# EAGLE board PCB_MCU (EAGLE 9.6.2)

Size 142.22 x 169.85 mm. Coordinates in mm from the lower left corner, seen from the top.
Outline: 0,0 142.22,0 142.22,169.85 0,169.85 0,0
Copper layers (1*16): Top 0.035mm / dielectric 1.5mm / Bottom 0.035mm
Design rules "default": minimum track width 6mil, minimum drill 0.35mm, track to track 6mil, track to pad 6mil, pad to pad 6mil, via to via 6mil, smd to smd 6mil, copper to edge 40mil, drill to drill 6mil, minimum pad ring 10mil, minimum via ring 8mil, stop-mask expansion 4mil, vias tented up to drill 0mil, thermal gap 10mil

## Footprints (pad centres in the part's own frame; a part is rotated, then mirrored left to right if it is on the bottom)
RWW0021A = smd 0.7 x 0.3: 1 -1.35,1.7; 9 -1.35,-1.7; 11 1.35,-1.7; 19 1.35,1.7 | smd 0.7 x 0.2: 2 -1.35,1.2; 3 -1.35,0.8; 4 -1.35,0.4; 5 -1.35,0; 6 -1.35,-0.4; 7 -1.35,-0.8; 8 -1.35,-1.2; 12 1.35,-1.2; 13 1.35,-0.8; 14 1.35,-0.4; 15 1.35,0; 16 1.35,0.4; 17 1.35,0.8; 18 1.35,1.2 | smd 0.3 x 1.9: 10 -0.3,-1.25; 20 0.3,1.25; 21 -0.3,1.25
SULLINS_PPTC041LFBN-RC = drill 1.07 square: 1 -3.81,0 | drill 1.07: 2 -1.27,0; 3 1.27,0; 4 3.81,0
CONN19_PPTC191LFBN-RC_SUL = drill 1.067 pad 1.575: 1 0,0; 2 2.54,0; 3 5.08,0; 4 7.62,0; 5 10.16,0; 6 12.7,0; 7 15.24,0; 8 17.78,0; 9 20.32,0; 10 22.86,0; 11 25.4,0; 12 27.94,0; 13 30.48,0; 14 33.02,0; 15 35.56,0; 16 38.1,0; 17 40.64,0; 18 43.18,0; 19 45.72,0
TE_282837-2 = drill 1.1 square: 1 -2.54,0 | drill 1.1: 2 2.54,0
C0805 = smd 1.3 x 1.5: 1 -0.95,0; 2 0.95,0
SOD3715X145N = smd 1.21 x 0.73: A 1.68,0; C -1.68,0
MBTB-D-SOD-923F-IMP-0402 = smd 0.5 x 0.6: 1 -0.525,0; 2 0.525,0
SOIC127P600X175-16N = smd 1.97 x 0.6: 1 -2.475,4.445; 2 -2.475,3.175; 3 -2.475,1.905; 4 -2.475,0.635; 5 -2.475,-0.635; 6 -2.475,-1.905; 7 -2.475,-3.175; 8 -2.475,-4.445; 9 2.475,-4.445; 10 2.475,-3.175; 11 2.475,-1.905; 12 2.475,-0.635; 13 2.475,0.635; 14 2.475,1.905; 15 2.475,3.175; 16 2.475,4.445
USB4110-GF-A_GCT = drill 0.66 pad 0.66: 13 -2.896,2.286; 14 2.896,2.286 | smd 2.159 x 2.007: 15 -5.11,2.788; 16 5.11,2.788; 17 -5.11,-1.142; 18 5.11,-1.142 | smd 0.61 x 1.143: A1-B12 -3.2,3.363; A4-B9 -2.4,3.363; A9-B4 2.4,3.363; A12-B1 3.2,3.363 | smd 0.305 x 1.143: A5 -1.25,3.363; A6 -0.25,3.363; A7 0.25,3.363; A8 1.25,3.363; B5 1.75,3.363; B6 0.75,3.363; B7 -0.75,3.363; B8 -1.75,3.363
6000-XXXX-RC = drill 0.9 pad 1.422: 1 -2.5,0; 2 2.5,0
SMARTLED-TTW = smd 0.8 x 0.5: A 0,-0.875; C 0,0.875 | smd 0.35 x 0.35: A@1 0,-0.5; C@1 0,0.5
MOD28_ESP32-C6-WROOM-1_EXP = smd 1.499 x 0.889: 1 -8.75,5.26; 2 -8.75,3.99; 3 -8.75,2.72; 4 -8.75,1.45; 5 -8.75,0.18; 6 -8.75,-1.09; 7 -8.75,-2.36; 8 -8.75,-3.63; 9 -8.75,-4.9; 10 -8.75,-6.17; 11 -8.75,-7.44; 12 -8.75,-8.71; 13 -8.75,-9.98; 14 -8.75,-11.25; 15 8.75,-11.25; 16 8.75,-9.98; 17 8.75,-8.71; 18 8.75,-7.44; 19 8.75,-6.17; 20 8.75,-4.9; 21 8.75,-3.63; 22 8.75,-2.36; 23 8.75,-1.09; 24 8.75,0.18; 25 8.75,1.45; 26 8.75,2.72; 27 8.75,3.99; 28 8.75,5.26 | smd 0.813 x 0.813: 29 -1.505,-0.46; 30 -2.755,0.79; 31 -2.755,-0.46; 32 -2.755,-1.71; 33 -1.505,-1.71; 34 -0.255,-1.71; 35 -0.255,-0.46; 36 -0.255,0.79; 37 -1.505,0.79
JP1 = drill 0.914 long: 1 0,-1.27; 2 0,1.27
SOIC127P599X175-8N = smd 1.97 x 0.6: 1 -2.47,1.905; 2 -2.47,0.635; 3 -2.47,-0.635; 4 -2.47,-1.905; 5 2.47,-1.905; 6 2.47,-0.635; 7 2.47,0.635; 8 2.47,1.905
TRANS_SS8050-G = smd 0.8 x 0.6: 1 -1.01,0.95; 2 -1.01,-0.95; 3 1.01,0
M0805 = smd 1.3 x 1.6: 1 -0.95,0; 2 0.95,0
MICROSD = smd 0.7 x 1.5: 1 9,-10.64; 2 7.9,-10.24; 3 6.8,-10.64; 4 5.7,-11.04; 5 4.6,-10.64; 6 3.5,-11.04; 7 2.4,-10.64; 8 1.3,-10.64 | smd 1.8 x 1.4: CD1 2,-0.44; CD2 8,-0.44 | smd 1.4 x 1.9: MT1 0.4,-13.54; MT2 13.6,-14.44
SOT95P280X145-6N = smd 1.32 x 0.59: 1 -1.145,0.95; 2 -1.145,0; 3 -1.145,-0.95; 4 1.145,-0.95; 5 1.145,0; 6 1.145,0.95
CONN_USB-AP-S-RA-SMT_ADM = smd 1.092 x 2.007: 1 -3.5,9.842; 2 -1,9.842; 3 1,9.842; 4 3.5,9.842 | drill 1.092 pad 1.092: 5 -2.286,7.366; 6 2.286,7.366 | smd 1.499 x 2.997: 7 -5.842,7.353; 8 5.842,7.353 | drill 0.991 pad 0.991: S_1_H1 -5.842,8.103; S_1_H2 -5.842,6.604; S_2_H1 5.842,8.103; S_2_H2 5.842,6.604
SW_1825910-6-4 = drill 0.99 square: 1 -3.25,2.25 | drill 0.99: 2 3.25,2.25; 3 -3.25,-2.25; 4 3.25,-2.25
SOD-123_ONS = smd 1.219 x 0.762: 1 -1.676,0; 2 1.676,0
QFN50P500X500X80-29N = smd 0.99 x 0.27: 1 -2.36,1.5; 2 -2.36,1; 3 -2.36,0.5; 4 -2.36,0; 5 -2.36,-0.5; 6 -2.36,-1; 7 -2.36,-1.5; 15 2.36,-1.5; 16 2.36,-1; 17 2.36,-0.5; 18 2.36,0; 19 2.36,0.5; 20 2.36,1; 21 2.36,1.5 | smd 0.27 x 0.99: 8 -1.5,-2.36; 9 -1,-2.36; 10 -0.5,-2.36; 11 0,-2.36; 12 0.5,-2.36; 13 1,-2.36; 14 1.5,-2.36; 22 1.5,2.36; 23 1,2.36; 24 0.5,2.36; 25 0,2.36; 26 -0.5,2.36; 27 -1,2.36; 28 -1.5,2.36 | smd 3.25 x 3.25: 29 0,0

## Placement (x,y rotation side)
3.3V_REGULATOR  TPS54JA20RWWR  [RWW0021A]  58.42,137.16 0 top
4PIN_I2C_TEST  PPTC041LFBN-RC  [SULLINS_PPTC041LFBN-RC]  -76.2,152.4 0 top  (outside the outline)
5V_REGULATOR  TPS54JA20RWWR  [RWW0021A]  25.4,91.44 90 top
19_PINOUT  PPTC191LFBN-RC  [CONN19_PPTC191LFBN-RC_SUL]  -49.53,77.47 180 top  (outside the outline)
BAT_JP  282837-2  [TE_282837-2]  -19.05,142.24 0 top  (outside the outline)
C3.3MCU  22uF  [C0805]  -20.32,167.64 0 top  (outside the outline)
C3.3MCU1  0.1uF  [C0805]  -31.75,161.29 0 top  (outside the outline)
C3.3OUT1  0.1uF  [C0805]  -62.23,161.29 0 top  (outside the outline)
C3.3OUT2  120uF  [C0805]  -72.39,161.29 0 top  (outside the outline)
C3.3OUT3  0.1uF  [C0805]  -82.55,161.29 0 top  (outside the outline)
C3.3OUT4  10uF  [C0805]  -92.71,161.29 0 top  (outside the outline)
C3.3OUT5  0.1uF  [C0805]  -102.87,161.29 0 top  (outside the outline)
C3.3OUT6  120uF  [C0805]  -113.03,161.29 0 top  (outside the outline)
C3.3OUT7  0.1uF  [C0805]  -123.19,161.29 0 top  (outside the outline)
C3.3OUT8  10uF  [C0805]  -133.35,161.29 0 top  (outside the outline)
C3.3OUT9  0.1uF  [C0805]  -143.51,161.29 0 top  (outside the outline)
C3.3OUT10  120uF  [C0805]  -91.44,152.4 0 top  (outside the outline)
C3.3OUT11  0.1uF  [C0805]  -21.59,161.29 0 top  (outside the outline)
C3.3OUT12  10uF  [C0805]  -102.87,152.4 0 top  (outside the outline)
CBOOT  100nF  [C0805]  -107.95,167.64 0 top  (outside the outline)
CBOOT1  100nF  [C0805]  -90.17,167.64 0 top  (outside the outline)
CBUS  1uF  [C0805]  -59.69,180.34 0 top  (outside the outline)
CENMCU  0.1uF  [C0805]  -30.48,167.64 0 top  (outside the outline)
CENS  0.1uF  [C0805]  -66.04,180.34 0 top  (outside the outline)
CENS1  0.1uF  [C0805]  -26.67,173.99 0 top  (outside the outline)
CIN  4.7uF  [C0805]  -135.89,180.34 0 top  (outside the outline)
CIN1  4.7uF  [C0805]  -142.24,180.34 0 top  (outside the outline)
CIN2  4.7uF  [C0805]  -148.59,180.34 0 top  (outside the outline)
CIN3  4.7uF  [C0805]  -154.94,180.34 0 top  (outside the outline)
CIN4  4.7uF  [C0805]  -161.29,180.34 0 top  (outside the outline)
CIN5  4.7uF  [C0805]  -16.51,186.69 0 top  (outside the outline)
CINX  1uF  [C0805]  -41.91,186.69 0 top  (outside the outline)
CINX1  1uF  [C0805]  -156.21,173.99 0 top  (outside the outline)
CINX2  1uF  [C0805]  -17.78,180.34 0 top  (outside the outline)
CINX3  1uF  [C0805]  -25.4,180.34 0 top  (outside the outline)
CINX4  1uF  [C0805]  -33.02,180.34 0 top  (outside the outline)
CINX5  1uF  [C0805]  -40.64,180.34 0 top  (outside the outline)
COUT  10uF  [C0805]  -46.99,180.34 0 top  (outside the outline)
COUT1  10uF  [C0805]  -130.81,167.64 0 top  (outside the outline)
COUT2  10uF  [C0805]  -138.43,167.64 0 top  (outside the outline)
COUT3  10uF  [C0805]  -146.05,167.64 0 top  (outside the outline)
COUT4  10uF  [C0805]  -153.67,167.64 0 top  (outside the outline)
COUT5  10uF  [C0805]  -161.29,167.64 0 top  (outside the outline)
CSS  82nF  [C0805]  -48.26,186.69 0 top  (outside the outline)
CSS1  82nF  [C0805]  -129.54,180.34 0 top  (outside the outline)
CUSB  10uF  [C0805]  -72.39,180.34 0 top  (outside the outline)
CUSB1  0.1uF  [C0805]  -34.29,173.99 0 top  (outside the outline)
CUSB2  4.7uF  [C0805]  -41.91,173.99 0 top  (outside the outline)
CUSB3  10uF  [C0805]  -49.53,173.99 0 top  (outside the outline)
CUSB5  10uF  [C0805]  -57.15,173.99 0 top  (outside the outline)
CVCC  2.2uF  [C0805]  -53.34,180.34 0 top  (outside the outline)
CVCC1  2.2uF  [C0805]  -19.05,173.99 0 top  (outside the outline)
D1  1N5819HW-7-F  [SOD3715X145N]  -87.63,186.69 0 top  (outside the outline)
D2  CPDQ5V0-HF  [MBTB-D-SOD-923F-IMP-0402]  -109.22,185.42 0 top  (outside the outline)
D3  CPDQ5V0-HF  [MBTB-D-SOD-923F-IMP-0402]  -114.3,185.42 0 top  (outside the outline)
D4  CPDQ5V0-HF  [MBTB-D-SOD-923F-IMP-0402]  -119.38,185.42 0 top  (outside the outline)
D5  1N5819HW-7-F  [SOD3715X145N]  -95.25,186.69 0 top  (outside the outline)
D6  CPDQ5V0-HF  [MBTB-D-SOD-923F-IMP-0402]  -124.46,185.42 0 top  (outside the outline)
D7  CPDQ5V0-HF  [MBTB-D-SOD-923F-IMP-0402]  -129.54,185.42 0 top  (outside the outline)
D8  CPDQ5V0-HF  [MBTB-D-SOD-923F-IMP-0402]  -134.62,185.42 0 top  (outside the outline)
D13  1N5819HW-7-F  [SOD3715X145N]  -102.87,186.69 0 top  (outside the outline)
D14  CPDQ5V0-HF  [MBTB-D-SOD-923F-IMP-0402]  -139.7,185.42 0 top  (outside the outline)
D15  CPDQ5V0-HF  [MBTB-D-SOD-923F-IMP-0402]  -144.78,185.42 0 top  (outside the outline)
D16  CPDQ5V0-HF  [MBTB-D-SOD-923F-IMP-0402]  -149.86,185.42 0 top  (outside the outline)
DA_CONVERTER_SD  CD74HC4050MT  [SOIC127P600X175-16N]  -154.94,109.22 0 top  (outside the outline)
I2C_USBC_IN  USB4110-GF-A  [USB4110-GF-A_GCT]  40.64,5.08 0 top
L1  680nH  [6000-XXXX-RC]  -29.21,142.24 0 top  (outside the outline)
L2  1uH  [6000-XXXX-RC]  -39.37,142.24 0 top  (outside the outline)
LED1  [SMARTLED-TTW]  -72.39,185.42 0 top  (outside the outline)
LED2  [SMARTLED-TTW]  -76.2,185.42 0 top  (outside the outline)
LED3  [SMARTLED-TTW]  -80.01,185.42 0 top  (outside the outline)
MCU  ESP32-C6-WROOM-1-N8  [MOD28_ESP32-C6-WROOM-1_EXP]  66.04,95.25 0 top
MCU_P_JP  [JP1]  -81.28,138.43 0 top  (outside the outline)
OP_AMP_LEDS  LM358DR  [SOIC127P599X175-8N]  -139.7,139.7 0 top  (outside the outline)
Q1  SS8050-G  [TRANS_SS8050-G]  -152.4,139.7 0 top  (outside the outline)
Q2  SS8050-G  [TRANS_SS8050-G]  -20.32,153.67 0 top  (outside the outline)
RENB  10k  [M0805]  -78.74,180.34 0 top  (outside the outline)
RENB1  10k  [M0805]  -64.77,173.99 0 top  (outside the outline)
RENMCU  10k  [M0805]  -40.64,167.64 0 top  (outside the outline)
RENMCU1  0R  [M0805]  -41.91,161.29 0 top  (outside the outline)
RENMCU2  0R  [M0805]  -52.07,161.29 0 top  (outside the outline)
RENT  66.5k  [M0805]  -97.79,180.34 0 top  (outside the outline)
RENT1  66.5k  [M0805]  -110.49,173.99 0 top  (outside the outline)
RFAULT2  10k  [M0805]  -50.8,167.64 0 top  (outside the outline)
RFAULT3  10k  [M0805]  -60.96,167.64 0 top  (outside the outline)
RFAULT4  10k  [M0805]  -71.12,167.64 0 top  (outside the outline)
RFBB  10k  [M0805]  -110.49,180.34 0 top  (outside the outline)
RFBB1  10k  [M0805]  -118.11,173.99 0 top  (outside the outline)
RFBT  26.7k  [M0805]  -123.19,180.34 0 top  (outside the outline)
RFBT1  45.3k  [M0805]  -140.97,173.99 0 top  (outside the outline)
RILIM  20k  [M0805]  -116.84,180.34 0 top  (outside the outline)
RILIM1  20k  [M0805]  -125.73,173.99 0 top  (outside the outline)
RILIM2  20k  [M0805]  -133.35,173.99 0 top  (outside the outline)
RLEDOUT  10k  [M0805]  -153.67,161.29 0 top  (outside the outline)
RLEDOUT1  10k  [M0805]  -114.3,152.4 0 top  (outside the outline)
RLEDOUT2  10k  [M0805]  -125.73,152.4 0 top  (outside the outline)
RLEDOUT3  10k  [M0805]  -137.16,152.4 0 top  (outside the outline)
RLEDOUT8  2.2k  [M0805]  -148.59,152.4 0 top  (outside the outline)
RLEDOUT9  2.2k  [M0805]  -160.02,152.4 0 top  (outside the outline)
RMODE  30.1k  [M0805]  -99.06,167.64 0 top  (outside the outline)
RMODE1  30.1k  [M0805]  -81.28,167.64 0 top  (outside the outline)
RPG  30.1k  [M0805]  -22.86,186.69 0 top  (outside the outline)
RPG1  30.1k  [M0805]  -104.14,180.34 0 top  (outside the outline)
RSDCS  2.2k  [M0805]  -123.19,167.64 0 top  (outside the outline)
RTRIP  6.98k  [M0805]  -148.59,173.99 0 top  (outside the outline)
RTRIP1  12.1k  [M0805]  -115.57,167.64 0 top  (outside the outline)
RU1  10k  [M0805]  -53.34,186.69 0 top  (outside the outline)
RU2  2k  [M0805]  -58.42,186.69 0 top  (outside the outline)
RU3  47.5k  [M0805]  -29.21,186.69 0 top  (outside the outline)
RU4  22.1k  [M0805]  -35.56,186.69 0 top  (outside the outline)
RU5  10k  [M0805]  -63.5,186.69 0 top  (outside the outline)
RU6  10k  [M0805]  -68.58,186.69 0 top  (outside the outline)
RUSB  5.1k  [M0805]  -85.09,180.34 0 top  (outside the outline)
RUSB1  5.1k  [M0805]  -72.39,173.99 0 top  (outside the outline)
RUSB2  5.1k  [M0805]  -80.01,173.99 0 top  (outside the outline)
RUSB3  5.1k  [M0805]  -87.63,173.99 0 top  (outside the outline)
RUSB6  5.1k  [M0805]  -95.25,173.99 0 top  (outside the outline)
RUSB7  5.1k  [M0805]  -102.87,173.99 0 top  (outside the outline)
SD_CONNECTOR  MICROSD  [MICROSD]  139.7,153.67 180 top
SDVC  0.7uF  [C0805]  -91.44,180.34 0 top  (outside the outline)
SENSOR_PSWITCH  AP22653W6-7  [SOT95P280X145-6N]  -50.8,153.67 0 top  (outside the outline)
SENSOR_USBA_IN  USB-AP-S-RA-SMT  [CONN_USB-AP-S-RA-SMT_ADM]  129.54,10.16 0 top
SERVO_PSWITCH  AP22653W6-7  [SOT95P280X145-6N]  -64.77,153.67 0 top  (outside the outline)
STEPPER_P_SWITCH  AP22653W6-7  [SOT95P280X145-6N]  -35.56,153.67 0 top  (outside the outline)
STEPPER_USBC_IN  USB4110-GF-A  [USB4110-GF-A_GCT]  13.97,5.08 0 top
SW4  1825910-6  [SW_1825910-6-4]  -114.3,140.97 0 top  (outside the outline)
SW5  1825910-6  [SW_1825910-6-4]  -124.46,140.97 0 top  (outside the outline)
U14  MMSZ5225BT1G  [SOD-123_ONS]  -92.71,115.57 0 top  (outside the outline)
U15  MMSZ5230BT1G  [SOD-123_ONS]  -123.19,115.57 0 top  (outside the outline)
UART_USB_CONVERTER  CP2102N-A02-GQFN28  [QFN50P500X500X80-29N]  -105.41,140.97 0 top  (outside the outline)
UART_USBC_IN  USB4110-GF-A  [USB4110-GF-A_GCT]  67.31,5.08 0 top

## Library data of the parts
3.3V_REGULATOR 5V_REGULATOR = TPS54JA20RWWR; MANUFACTURER_PART_NUMBER: TPS54JA20RWWR
4PIN_I2C_TEST = PPTC041LFBN-RC; AVAILABILITY: In Stock; CHECK_PRICES: https://www.snapeda.com/parts/PPTC041LFBN-RC/Sullins+Connector+Solutions/view-part/?ref=eda; DESCRIPTION: 4 Position Header Connector 0.100 (2.54mm) Through Hole Tin; MF: Sullins Connector; MP: PPTC041LFBN-RC; PACKAGE: None; PRICE: None; PURCHASE-URL: https://www.snapeda.com/api/url_track_click_mouser/?unipart_id=285917&manufacturer=Sullins Connector&part_name=PPTC041LFBN-RC&search_term=pptc041lfbn-rc; SNAPEDA_LINK: https://www.snapeda.com/parts/PPTC041LFBN-RC/Sullins+Connector+Solutions/view-part/?ref=snap
19_PINOUT = PPTC191LFBN-RC; COPYRIGHT: Copyright (C) 2023 Ultra Librarian. All rights reserved.; MANUFACTURER_PART_NUMBER: PPTC191LFBN-RC; MFR_NAME: Sullins; TYPE: Headers, Receptacles, Female Sockets
BAT_JP = Terminal_Block2P; AVAILABILITY: In Stock; CHECK_PRICES: https://www.snapeda.com/parts/282837-2/TE+Connectivity+AMP+Connectors/view-part/?ref=eda; COMMENT: 282837-2; DESCRIPTION: Connector Terminal Blocks Receptacle 2 Position 5.08mm Solder Straight Thru-Hole 13.5A/Contact; MF: TE Connectivity; MP: 282837-2; PACKAGE: None; PRICE: None; PURCHASE-URL: https://pricing.snapeda.com/search?q=282837-2&ref=eda; SNAPEDA_LINK: https://www.snapeda.com/parts/282837-2/TE+Connectivity+AMP+Connectors/view-part/?ref=snap
C3.3MCU C3.3MCU1 C3.3OUT1-C3.3OUT12 CBOOT CBOOT1 CBUS CENMCU CENS CENS1 CIN CIN1-CIN5 CINX CINX1-CINX5 COUT COUT1-COUT5 CSS CSS1 CUSB CUSB1-CUSB3 CUSB5 CVCC CVCC1 SDVC = rcl; SPICEPREFIX: C
D1 D5 D13 = 1N5819HW-7-F; AVAILABILITY: In Stock; CHECK_PRICES: https://www.snapeda.com/parts/1N5819HW-7-F/Diodes+Inc./view-part/?ref=eda; DESCRIPTION: Diode Schottky 1A 40V SOD123 | Diodes Inc 1N5819HW-7-F; MF: Diodes Inc.; MP: 1N5819HW-7-F; PACKAGE: SOD-123 Fairchild Semiconductor; PRICE: None; PURCHASE-URL: https://www.snapeda.com/api/url_track_click_mouser/?unipart_id=42272&manufacturer=Diodes Inc.&part_name=1N5819HW-7-F&search_term=1n5819hw-7-f; SNAPEDA_LINK: https://www.snapeda.com/parts/1N5819HW-7-F/Diodes+Inc./view-part/?ref=snap
D2-D4 D6-D8 D14-D16 = CPDQ5V0-HF; AVAILABILITY: In Stock; CHECK_PRICES: https://www.snapeda.com/parts/CPDQ5V0-HF/Comchip+Technology/view-part/?ref=eda; DESCRIPTION: 18.6V Clamp 9.4A (8/20µs) Ipp Tvs Diode Surface Mount 0402/SOD-923F; MF: Comchip Technology; MP: CPDQ5V0-HF; PACKAGE: 0402 Comchip; PRICE: None; PURCHASE-URL: https://www.snapeda.com/api/url_track_click_mouser/?unipart_id=809934&manufacturer=Comchip Technology&part_name=CPDQ5V0-HF&search_term=cpdq5v0-hf; SNAPEDA_LINK: https://www.snapeda.com/parts/CPDQ5V0-HF/Comchip+Technology/view-part/?ref=snap
DA_CONVERTER_SD = CD74HC4050MT; AVAILABILITY: In Stock; CHECK_PRICES: https://www.snapeda.com/parts/CD74HC4050MT/Texas+Instruments/view-part/?ref=eda; DESCRIPTION: 6-ch, 2-V to 6-V buffers; MF: Texas Instruments; MP: CD74HC4050MT; PACKAGE: SOIC-16 Texas Instruments; PRICE: None; PURCHASE-URL: https://www.snapeda.com/api/url_track_click_mouser/?unipart_id=1170164&manufacturer=Texas Instruments&part_name=CD74HC4050MT&search_term=cd74hc4050; SNAPEDA_LINK: https://www.snapeda.com/parts/CD74HC4050MT/Texas+Instruments/view-part/?ref=snap
I2C_USBC_IN STEPPER_USBC_IN UART_USBC_IN = USB4110-GF-A; COPYRIGHT: Copyright (C) 2023 Ultra Librarian. All rights reserved.; MANUFACTURER_PART_NUMBER: USB4110-GF-A; MFR_NAME: Global Connector Technology
L1 L2 = rcl; SPICEPREFIX: L
LED1-LED3 SD_CONNECTOR = adafruit
MCU = ESP32-C6-WROOM-1U; COPYRIGHT: Copyright (C) 2023 Ultra Librarian. All rights reserved.; MANUFACTURER_PART_NUMBER: ESP32-C6-WROOM-1-N8; MFR_NAME: Espressif Systems; TYPE: RF
MCU_P_JP = jumper
OP_AMP_LEDS = LM358DR; AVAILABILITY: In Stock; CHECK_PRICES: https://www.snapeda.com/parts/LM358DR/Texas+Instruments/view-part/?ref=eda; DESCRIPTION: Dual, 30-V, 700-kHz operational amplifier; MF: Texas Instruments; MP: LM358DR; PACKAGE: SOIC-8 Texas Instruments; PRICE: None; PURCHASE-URL: https://www.snapeda.com/api/url_track_click_mouser/?unipart_id=6639&manufacturer=Texas Instruments&part_name=LM358DR&search_term=lm358dr; SNAPEDA_LINK: https://www.snapeda.com/parts/LM358DR/Texas+Instruments/view-part/?ref=snap
Q1 Q2 = SS8050-G; AVAILABILITY: In Stock; CHECK_PRICES: https://www.snapeda.com/parts/SS8050-G/Comchip+Technology/view-part/?ref=eda; DESCRIPTION: Bipolar (BJT) Transistor NPN 25 V 1.5 A 100MHz 300 mW Surface Mount SOT-23-3; MF: Comchip Technology; MP: SS8050-G; PACKAGE: TO-236 Comchip; PRICE: None; PURCHASE-URL: https://www.snapeda.com/api/url_track_click_mouser/?unipart_id=809142&manufacturer=Comchip Technology&part_name=SS8050-G&search_term=ss8050-g; SNAPEDA_LINK: https://www.snapeda.com/parts/SS8050-G/Comchip+Technology/view-part/?ref=snap
RENB RENB1 RENMCU RENMCU1 RENMCU2 RENT RENT1 RFAULT2-RFAULT4 RFBB RFBB1 RFBT RFBT1 RILIM RILIM1 RILIM2 RLEDOUT RLEDOUT1-RLEDOUT3 RLEDOUT8 RLEDOUT9 RMODE RMODE1 RPG RPG1 RSDCS RTRIP RTRIP1 RU1-RU6 RUSB RUSB1-RUSB3 RUSB6 RUSB7 = rcl; SPICEPREFIX: R
SENSOR_PSWITCH SERVO_PSWITCH STEPPER_P_SWITCH = AP22653W6-7; AVAILABILITY: In Stock; CHECK_PRICES: https://www.snapeda.com/parts/AP22653W6-7/Diodes+Inc./view-part/?ref=eda; DESCRIPTION: Power Switch/Driver 1:1 P-Channel 2.1A SOT-23-6; MF: Diodes Incorporated; MP: AP22653W6-7; PACKAGE: SOT-23-6 Diodes Incorporated; PRICE: None; PURCHASE-URL: https://www.snapeda.com/api/url_track_click_mouser/?unipart_id=4792807&manufacturer=Diodes Incorporated&part_name=AP22653W6-7&search_term=ap22653w6-7; SNAPEDA_LINK: https://www.snapeda.com/parts/AP22653W6-7/Diodes+Inc./view-part/?ref=snap
SENSOR_USBA_IN = USB-AP-S-RA-SMT; COPYRIGHT: Copyright (C) 2023 Ultra Librarian. All rights reserved.; MANUFACTURER_PART_NUMBER: USB-AP-S-RA-SMT; MFR_NAME: ADAM TECHNOLOGIES INC
SW4 SW5 = 1825910-6; AVAILABILITY: In Stock; CHECK_PRICES: https://www.snapeda.com/parts/1825910-6/TE+Connectivity+ALCOSWITCH+Switches/view-part/?ref=eda; COMMENT: 1825910-6; DESCRIPTION: Switch Push Button OFF (ON) SPST Round Button 0.05A 24VDC Momentary Contact PC Pins Thru-Hole; MF: TE Connectivity; MP: 1825910-6; PACKAGE: None; PRICE: None; PURCHASE-URL: https://www.snapeda.com/api/url_track_click_mouser/?unipart_id=226996&manufacturer=TE Connectivity&part_name=1825910-6&search_term=1825910-6; SNAPEDA_LINK: https://www.snapeda.com/parts/1825910-6/TE+Connectivity+ALCOSWITCH+Switches/view-part/?ref=snap
U14 = MMSZ5225BT1G; COPYRIGHT: Copyright (C) 2023 Ultra Librarian. All rights reserved.; MANUFACTURER_PART_NUMBER: MMSZ5225BT1G; MFR_NAME: onsemi
U15 = MMSZ5230BT1G; COPYRIGHT: Copyright (C) 2023 Ultra Librarian. All rights reserved.; MANUFACTURER_PART_NUMBER: MMSZ5230BT1G; MFR_NAME: onsemi
UART_USB_CONVERTER = CP2102N-A02-GQFN28; AVAILABILITY: In Stock; CHECK_PRICES: https://www.snapeda.com/parts/CP2102N-A02-GQFN28/Silicon+Labs/view-part/?ref=eda; DESCRIPTION: USB Bridge, USB to UART USB 2.0 UART Interface 28-QFN (5x5); MF: Silicon Labs; MP: CP2102N-A02-GQFN28; PACKAGE: WFQFN-28 Silicon Labs; PRICE: None; PURCHASE-URL: https://www.snapeda.com/api/url_track_click_mouser/?unipart_id=4872321&manufacturer=Silicon Labs&part_name=CP2102N-A02-GQFN28&search_term=cp2102n-a02-gqfn28; SNAPEDA_LINK: https://www.snapeda.com/parts/CP2102N-A02-GQFN28/Silicon+Labs/view-part/?ref=snap

## Nets
0: 4PIN_I2C_TEST.4 19_PINOUT.19 C3.3OUT1.2 C3.3OUT2.2 C3.3OUT3.1 C3.3OUT4.1 C3.3OUT5.2 C3.3OUT6.2 C3.3OUT7.1 C3.3OUT8.1 C3.3OUT9.2 C3.3OUT10.2 C3.3OUT11.1 C3.3OUT12.1 CBUS.2 CENS1.2 CENS.2 CUSB1.1 CUSB2.1 CUSB3.2 CUSB5.2 CUSB.2 D2.1 D3.1 D4.1 D6.1 D7.1 D8.1 D14.1 D15.1 D16.1 I2C_USBC_IN.A1-B12 I2C_USBC_IN.A12-B1 RILIM1.1 RILIM2.1 RILIM.1 RU1.1 RU3.1 RUSB1.2 RUSB2.2 RUSB3.2 RUSB6.2 RUSB7.2 RUSB.2 SENSOR_PSWITCH.2 SENSOR_USBA_IN.4 SERVO_PSWITCH.2 STEPPER_P_SWITCH.2 STEPPER_USBC_IN.A1-B12 STEPPER_USBC_IN.A12-B1 SW4.1 SW5.1 UART_USB_CONVERTER.3 UART_USB_CONVERTER.29 UART_USBC_IN.A1-B12 UART_USBC_IN.A12-B1
3.3VOUT: 19_PINOUT.9 C3.3MCU1.1 C3.3MCU.1 C3.3OUT3.2 C3.3OUT4.2 COUT1.1 COUT2.1 COUT.1 CUSB1.2 CUSB2.2 DA_CONVERTER_SD.1 L1.2 LED2.A@1 MCU_P_JP.2 OP_AMP_LEDS.8 RFAULT2.2 RFBT.2 RLEDOUT2.2 RLEDOUT3.2 RU2.2 SD_CONNECTOR.4 SDVC.1 SENSOR_PSWITCH.1 UART_USB_CONVERTER.6 UART_USB_CONVERTER.7
5VINUSB1: C3.3OUT5.1 C3.3OUT6.1 CUSB3.1 D5.C SERVO_PSWITCH.6
5VINUSB21: C3.3OUT9.1 C3.3OUT10.1 CUSB5.1 D13.C STEPPER_P_SWITCH.6
5VOUT: 4PIN_I2C_TEST.1 19_PINOUT.1 C3.3OUT7.2 C3.3OUT8.2 C3.3OUT11.2 C3.3OUT12.2 COUT3.1 COUT4.1 COUT5.1 CUSB.1 D1.C L2.2 LED3.A@1 RFAULT3.2 RFAULT4.2 RFBT1.2 RLEDOUT1.2 RLEDOUT.2 SERVO_PSWITCH.1 STEPPER_P_SWITCH.1
12VIN: 3.3V_REGULATOR.10 3.3V_REGULATOR.21 5V_REGULATOR.10 5V_REGULATOR.21 BAT_JP.2 CIN1.1 CIN2.1 CIN3.1 CIN4.1 CIN5.1 CIN.1 CINX1.1 CINX2.1 CINX3.1 CINX4.1 CINX5.1 CINX.1 RENT1.2 RENT.2
D+: D3.2 UART_USB_CONVERTER.4 UART_USBC_IN.A6 UART_USBC_IN.B6
D-: D4.2 UART_USB_CONVERTER.5 UART_USBC_IN.A7 UART_USBC_IN.B7
DTR: Q2.2 RU5.2 UART_USB_CONVERTER.28
EN: CENMCU.1 CENS.1 MCU.3 Q1.3 RENMCU.1 SW4.4
FSPICLK: 19_PINOUT.4 DA_CONVERTER_SD.3 DA_CONVERTER_SD.9 MCU.6
FSPID: 19_PINOUT.5 DA_CONVERTER_SD.5 MCU.7
FSPIQ: 19_PINOUT.6 MCU.27 SD_CONNECTOR.7
GND: 3.3V_REGULATOR.2 3.3V_REGULATOR.6 3.3V_REGULATOR.11 3.3V_REGULATOR.12 3.3V_REGULATOR.13 3.3V_REGULATOR.14 3.3V_REGULATOR.15 3.3V_REGULATOR.16 3.3V_REGULATOR.17 3.3V_REGULATOR.18 5V_REGULATOR.2 5V_REGULATOR.6 5V_REGULATOR.11 5V_REGULATOR.12 5V_REGULATOR.13 5V_REGULATOR.14 5V_REGULATOR.15 5V_REGULATOR.16 5V_REGULATOR.17 5V_REGULATOR.18 BAT_JP.1 C3.3MCU1.2 C3.3MCU.2 CENMCU.2 CIN1.2 CIN2.2 CIN3.2 CIN4.2 CIN5.2 CIN.2 CINX1.2 CINX2.2 CINX3.2 CINX4.2 CINX5.2 CINX.2 COUT1.2 COUT2.2 COUT3.2 COUT4.2 COUT5.2 COUT.2 CSS1.1 CSS.1 CVCC1.1 CVCC.1 DA_CONVERTER_SD.8 MCU.1 MCU.28 MCU.29 MCU.30 MCU.31 MCU.32 MCU.33 MCU.34 MCU.35 MCU.36 MCU.37 OP_AMP_LEDS.4 RENB1.1 RENB.1 RFBB1.1 RFBB.1 RMODE1.1 RMODE.1 RTRIP1.1 RTRIP.1 SD_CONNECTOR.6 SD_CONNECTOR.MT1 SD_CONNECTOR.MT2 SDVC.2 U14.2 U15.2
GPIO1: MCU.9 SENSOR_PSWITCH.3
GPIO3: 19_PINOUT.18 MCU.26
GPIO5: 19_PINOUT.10 MCU.5
GPIO8: 19_PINOUT.11 D15.2 MCU.10 STEPPER_USBC_IN.A6 STEPPER_USBC_IN.B6
GPIO9: 19_PINOUT.12 D16.2 MCU.15 STEPPER_USBC_IN.A7 STEPPER_USBC_IN.B7
GPIO12: 19_PINOUT.13 MCU.13 SERVO_PSWITCH.3
GPIO13: 19_PINOUT.14 MCU.14 STEPPER_P_SWITCH.3
GPIO15: 19_PINOUT.15 MCU.23
GPIO19: 19_PINOUT.16 MCU.17
GPIO20: 19_PINOUT.17 MCU.18
IO0: CENS1.1 MCU.8 Q2.3 SW5.4
MCUSCL: 4PIN_I2C_TEST.2 19_PINOUT.2 D7.2 I2C_USBC_IN.A6 I2C_USBC_IN.B6 MCU.11 SENSOR_USBA_IN.3
MCUSDA: 4PIN_I2C_TEST.3 19_PINOUT.3 D8.2 I2C_USBC_IN.A7 I2C_USBC_IN.B7 MCU.12 SENSOR_USBA_IN.2
MCUSDCS: 19_PINOUT.8 DA_CONVERTER_SD.7 MCU.16
N$1: 3.3V_REGULATOR.1 CBOOT.1
N$2: 3.3V_REGULATOR.20 CBOOT.2 L1.1
N$3: 3.3V_REGULATOR.19 CVCC.2 RPG.1
N$4: 3.3V_REGULATOR.9 RPG.2
N$5: 3.3V_REGULATOR.8 RENB.2 RENT.1
N$6: 3.3V_REGULATOR.4 RMODE.2
N$7: 3.3V_REGULATOR.3 RTRIP.2
N$8: 3.3V_REGULATOR.5 CSS.2
N$9: 3.3V_REGULATOR.7 RFBB.2 RFBT.1
N$10: RENMCU1.2 UART_USB_CONVERTER.26
N$11: 5V_REGULATOR.1 CBOOT1.1
N$12: RENMCU2.2 UART_USB_CONVERTER.25
N$13: 5V_REGULATOR.20 CBOOT1.2 L2.1
N$14: 5V_REGULATOR.19 CVCC1.2 RPG1.1
N$15: 5V_REGULATOR.9 RPG1.2
N$16: 5V_REGULATOR.4 RMODE1.2
N$17: 5V_REGULATOR.3 RTRIP1.2
N$18: 5V_REGULATOR.5 CSS1.2
N$19: 5V_REGULATOR.8 RENB1.2 RENT1.1
N$20: LED3.C@1 RLEDOUT9.1
N$22: 5V_REGULATOR.7 RFBB1.2 RFBT1.1
N$26: RU1.2 UART_USB_CONVERTER.11
N$40: RU2.1 UART_USB_CONVERTER.9
N$41: CBUS.1 RU3.2 RU4.1 UART_USB_CONVERTER.8
N$42: Q1.1 RU5.1
N$43: Q2.1 RU6.1
N$52: MCU.2 MCU_P_JP.1 RENMCU.2
N$53: RUSB.1 UART_USBC_IN.A5
N$54: LED1.C@1 RSDCS.2
N$55: DA_CONVERTER_SD.10 LED1.A@1
N$56: RUSB1.1 UART_USBC_IN.B5
N$57: DA_CONVERTER_SD.2 SD_CONNECTOR.5
N$58: RILIM.2 SENSOR_PSWITCH.5
N$59: DA_CONVERTER_SD.4 SD_CONNECTOR.3
N$60: C3.3OUT1.1 C3.3OUT2.1 SENSOR_PSWITCH.6 SENSOR_USBA_IN.1
N$61: RFAULT2.1 SENSOR_PSWITCH.4
N$62: I2C_USBC_IN.A5 RUSB2.1
N$63: I2C_USBC_IN.B5 RUSB3.1
N$66: RUSB6.1 STEPPER_USBC_IN.A5
N$67: RILIM1.2 SERVO_PSWITCH.5
N$68: RFAULT3.1 SERVO_PSWITCH.4
N$69: RUSB7.1 STEPPER_USBC_IN.B5
N$70: RILIM2.2 STEPPER_P_SWITCH.5
N$71: RFAULT4.1 STEPPER_P_SWITCH.4
N$74: OP_AMP_LEDS.5 RLEDOUT2.1 U14.1
N$75: OP_AMP_LEDS.6 RLEDOUT3.1
N$76: OP_AMP_LEDS.7 RLEDOUT8.2
N$77: OP_AMP_LEDS.3 RLEDOUT.1 U15.1
N$78: OP_AMP_LEDS.2 RLEDOUT1.1
N$79: OP_AMP_LEDS.1 RLEDOUT9.2
N$80: LED2.C@1 RLEDOUT8.1
N$81: UART_USB_CONVERTER.27
N$85: UART_USB_CONVERTER.1
N$86: UART_USB_CONVERTER.23
N$91: DA_CONVERTER_SD.11
N$92: DA_CONVERTER_SD.14
RTS: Q1.2 RU6.2 UART_USB_CONVERTER.24
RXD0: MCU.24 RENMCU2.1
SDCD: 19_PINOUT.7 MCU.4 SD_CONNECTOR.CD1
SDCS: DA_CONVERTER_SD.6 RSDCS.1 SD_CONNECTOR.2
TXD0: MCU.25 RENMCU1.1
VBUS: D1.A D2.2 RU4.2 UART_USBC_IN.A4-B9 UART_USBC_IN.A9-B4
VBUS11: D5.A D6.2 I2C_USBC_IN.A4-B9 I2C_USBC_IN.A9-B4
VBUS21: D13.A D14.2 STEPPER_USBC_IN.A4-B9 STEPPER_USBC_IN.A9-B4

## Tracks (layer width: path | path; a pad name or v marks a point on that pad's centre or on a via)
0  (55 unrouted)
3.3VOUT  (24 unrouted)
5VINUSB1  (4 unrouted)
5VINUSB21  (4 unrouted)
5VOUT  (19 unrouted)
12VIN  (18 unrouted)
D+  (3 unrouted)
D-  (3 unrouted)
DTR  (2 unrouted)
EN  (5 unrouted)
FSPICLK  (3 unrouted)
FSPID  (2 unrouted)
FSPIQ  (2 unrouted)
GND  (72 unrouted)
GPIO1  (1 unrouted)
GPIO3  (1 unrouted)
GPIO5  (1 unrouted)
GPIO8  (4 unrouted)
GPIO9  (4 unrouted)
GPIO12  (2 unrouted)
GPIO13  (2 unrouted)
GPIO15  (1 unrouted)
GPIO19  (1 unrouted)
GPIO20  (1 unrouted)
IO0  (3 unrouted)
MCUSCL  (6 unrouted)
MCUSDA  (6 unrouted)
MCUSDCS  (2 unrouted)
N$1  (1 unrouted)
N$2  (2 unrouted)
N$3  (2 unrouted)
N$4  (1 unrouted)
N$5  (2 unrouted)
N$6  (1 unrouted)
N$7  (1 unrouted)
N$8  (1 unrouted)
N$9  (2 unrouted)
N$10  (1 unrouted)
N$11  (1 unrouted)
N$12  (1 unrouted)
N$13  (2 unrouted)
N$14  (2 unrouted)
N$15  (1 unrouted)
N$16  (1 unrouted)
N$17  (1 unrouted)
N$18  (1 unrouted)
N$19  (2 unrouted)
N$20  (1 unrouted)
N$22  (2 unrouted)
N$26  (1 unrouted)
N$40  (1 unrouted)
N$41  (3 unrouted)
N$42  (1 unrouted)
N$43  (1 unrouted)
N$52  (2 unrouted)
N$53  (1 unrouted)
N$54  (1 unrouted)
N$55  (1 unrouted)
N$56  (1 unrouted)
N$57  (1 unrouted)
N$58  (1 unrouted)
N$59  (1 unrouted)
N$60  (3 unrouted)
N$61  (1 unrouted)
N$62  (1 unrouted)
N$63  (1 unrouted)
N$66  (1 unrouted)
N$67  (1 unrouted)
N$68  (1 unrouted)
N$69  (1 unrouted)
N$70  (1 unrouted)
N$71  (1 unrouted)
N$74  (2 unrouted)
N$75  (1 unrouted)
N$76  (1 unrouted)
N$77  (2 unrouted)
N$78  (1 unrouted)
N$79  (1 unrouted)
N$80  (1 unrouted)
RTS  (2 unrouted)
RXD0  (1 unrouted)
SDCD  (2 unrouted)
SDCS  (2 unrouted)
TXD0  (1 unrouted)
VBUS  (4 unrouted)
VBUS11  (3 unrouted)
VBUS21  (3 unrouted)